# EAGLE board ADXL377 Breakout-v1.01 (EAGLE 6.4)
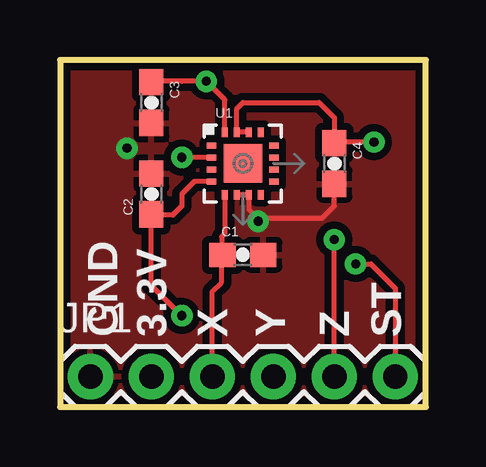
[diagram p0: board, top side]
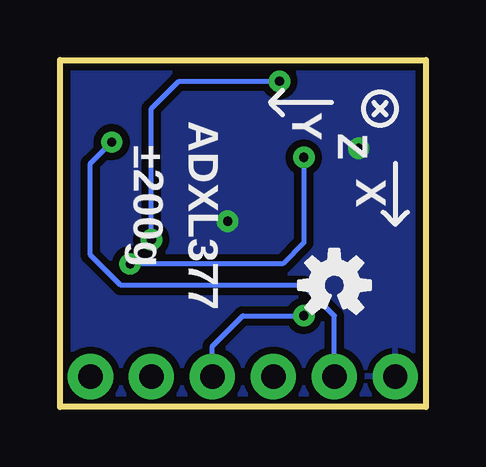
[diagram p1: board, bottom side, seen from below]

Size 15.24 x 14.48 mm. Coordinates in mm from the lower left corner, seen from the top.
Outline: 0,0 15.24,0 15.24,14.48 0,14.48 0,0
Copper layers (1*16): Top 0.035mm / dielectric 1.5mm / Bottom 0.035mm
Design rules "SparkFun": minimum track width 8mil, minimum drill 20mil, track to track 8mil, track to pad 8mil, pad to pad 8mil, via to via 8mil, smd to smd 8mil, copper to edge 8mil, drill to drill 8mil, minimum pad ring 12mil, minimum via ring 10mil, stop-mask expansion 4mil, vias tented up to drill 20mil, thermal gap 10mil

## Footprints (pad centres in the part's own frame; a part is rotated, then mirrored left to right if it is on the bottom)
0603-CAP = smd 1.1 x 1: 1 -0.85,0; 2 0.85,0
1X06 = drill 1.016 pad 1.88: 1 0,0; 2 2.54,0; 3 5.08,0; 4 7.62,0; 5 10.16,0; 6 12.7,0
LFCSP_LQ-16 = smd 0.4 x 0.25: 1 -1.3,0.75; 2 -1.3,0.25; 3 -1.3,-0.25; 4 -1.3,-0.75; 9 1.3,-0.75; 10 1.3,-0.25; 11 1.3,0.25; 12 1.3,0.75 | smd 0.25 x 0.4: 5 -0.75,-1.3; 6 -0.25,-1.3; 7 0.25,-1.3; 8 0.75,-1.3; 13 0.75,1.3; 14 0.25,1.3; 15 -0.25,1.3; 16 -0.75,1.3 | smd 1.6 x 1.6: EXP 0,0

## Placement (x,y rotation side)
C1  10nF  [0603-CAP]  7.62,6.35 0 top
C2  10nF  [0603-CAP]  3.81,8.89 90 top
C3  10nF  [0603-CAP]  3.81,12.7 270 top
C4  0.1uF  [0603-CAP]  11.43,10.16 270 top
JP1  [1X06]  1.27,1.27 0 top
LOGO2  OSHW-LOGOS  [OSHW-LOGO-S]  3.81,5.08 0 bottom
U1  ADXL377  [LFCSP_LQ-16]  7.62,10.16 0 top

## Library data of the parts
C1-C3 = SparkFun-Capacitors; PROD_ID: CAP-00867
C4 = SparkFun-Capacitors; PROD_ID: CAP-00810
JP1 = SparkFun-Connectors
LOGO2 = SparkFun-Aesthetics
U1 = SparkFun-Sensors

## Nets
3.3V: C4.1 JP1.2 U1.14 U1.15
GND: C1.2 C2.2 C3.2 C4.2 JP1.1 U1.6 U1.7
ST: JP1.6 U1.2
X: C1.1 JP1.3 U1.5
Y: C2.1 JP1.4 U1.4
Z: C3.1 JP1.5 U1.16

## Tracks (layer width: path | path; a pad name or v marks a point on that pad's centre or on a via)
3.3V  (via drill 0.38)
  Top 0.203: U1.14 U1.15 7.37,12.45 7.62,12.7 10.79,12.7 11.43,12.06 C4.1 11.47,11.05 v13.08,11.05
  Bottom 0.203: JP1.2 3.81,3.81 5.08,5.08 12.7,5.08 13.97,6.35 13.97,10.16 v13.08,11.05
GND  (via drill 0.38)
  Top 0.203: U1.6 U1.7 7.87,8.26 8.26,7.87 10.92,7.87 11.43,8.38 C4.2
  other vias: 2.79,10.79 8.26,7.75
  pour Bottom (isolate 0.305): 0,14.48 15.24,14.48 15.24,0 0,0
  pour Top (isolate 0.305): 0,0 0,14.48 15.24,14.48 15.24,0
ST  (via drill 0.38)
  Top 0.203: U1.2 v5.08,10.41 | v12.32,5.97 12.95,5.97 13.97,4.95 JP1.6
  Bottom 0.203: v5.08,10.41 5.08,6.86 5.97,5.97 v12.32,5.97
X
  Top 0.203: JP1.3 6.35,4.83 6.73,5.21 6.73,6.31 C1.1 6.73,6.39 6.73,7.11 6.87,7.25 U1.5
Y  (via drill 0.38)
  Top 0.203: v5.08,3.81 3.81,5.08 C2.1 3.85,8 4.7,8 5.08,8.38 5.08,8.89 5.6,9.41 U1.4
  Bottom 0.203: JP1.4 8.89,2.54 7.62,3.81 v5.08,3.81
Z  (via drill 0.38)
  Top 0.203: U1.16 6.87,12.81 v6.1,13.59 5.08,13.59 3.85,13.59 C3.1 | JP1.5 v11.43,6.99
  Bottom 0.203: v11.43,6.99 11.43,12.45 10.29,13.59 v6.1,13.59

## Text on the board
tPlace: GND | 3.3V | X | Y | Z | ST
bPlace: Y | ADXL377 | Z | ±200g | X